# EAGLE board schem (EAGLE 9.4.2)
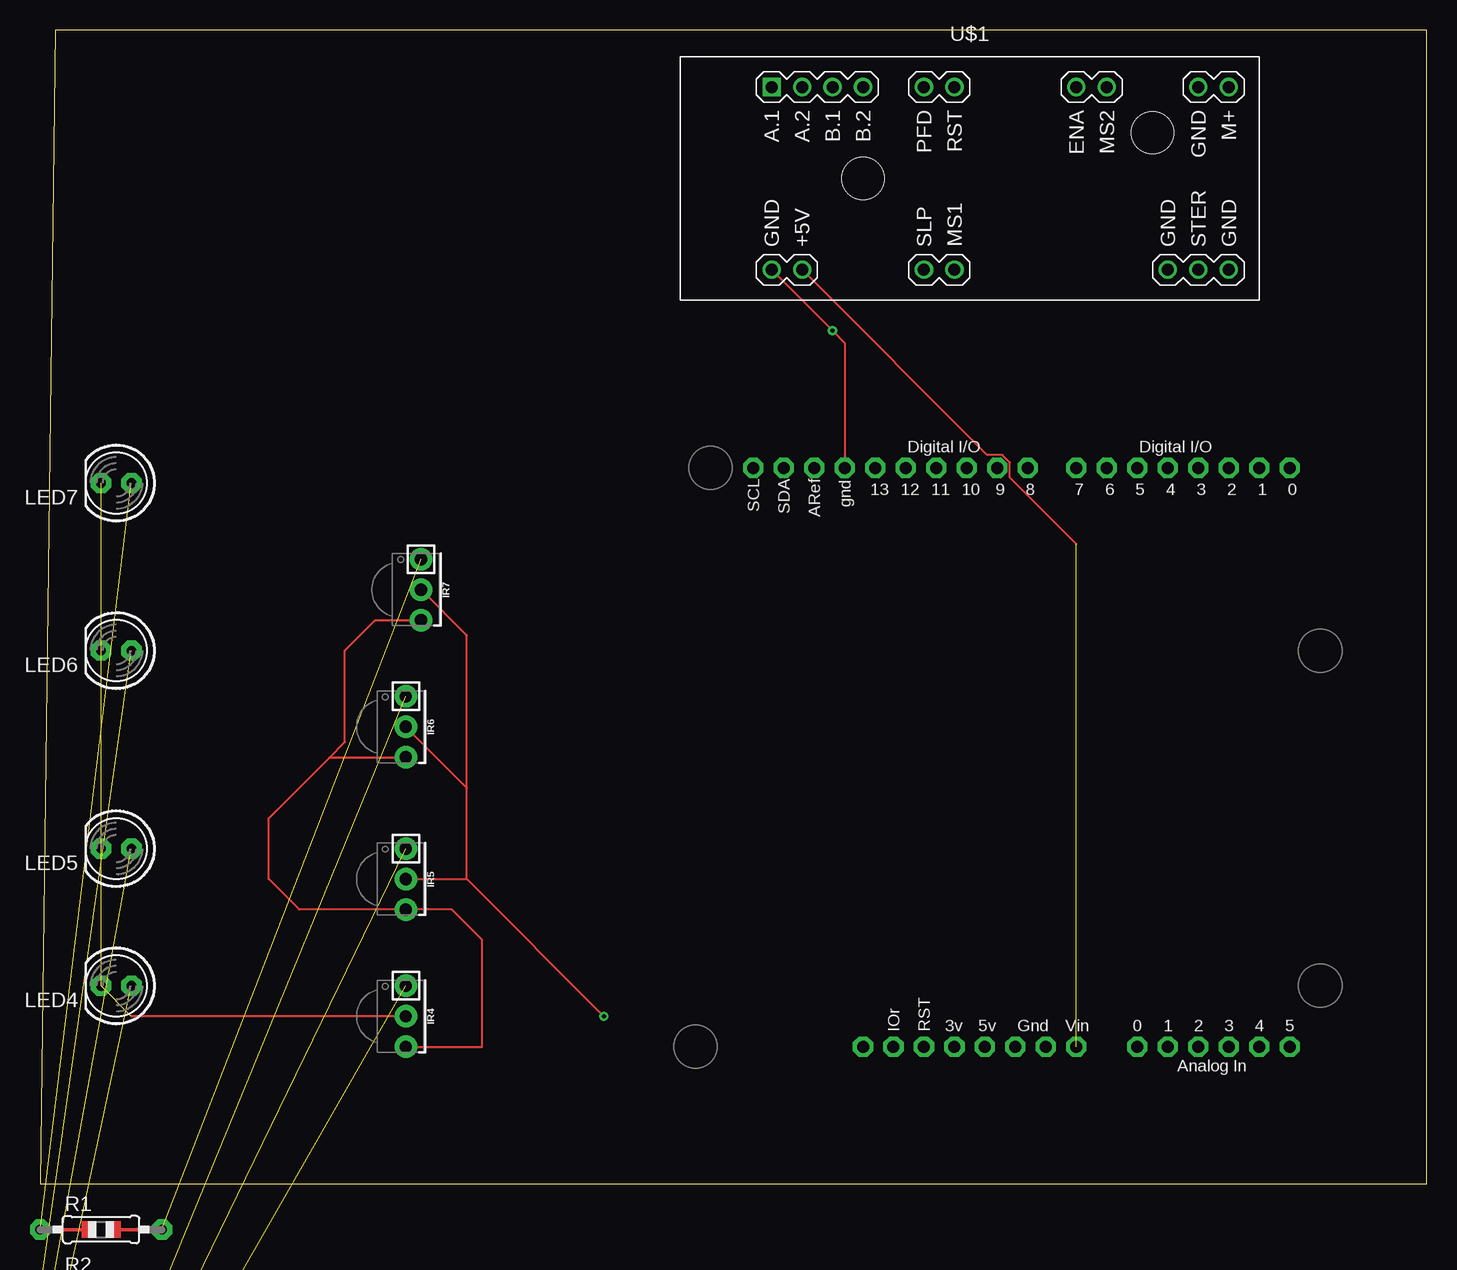
[diagram p0: board, top side]
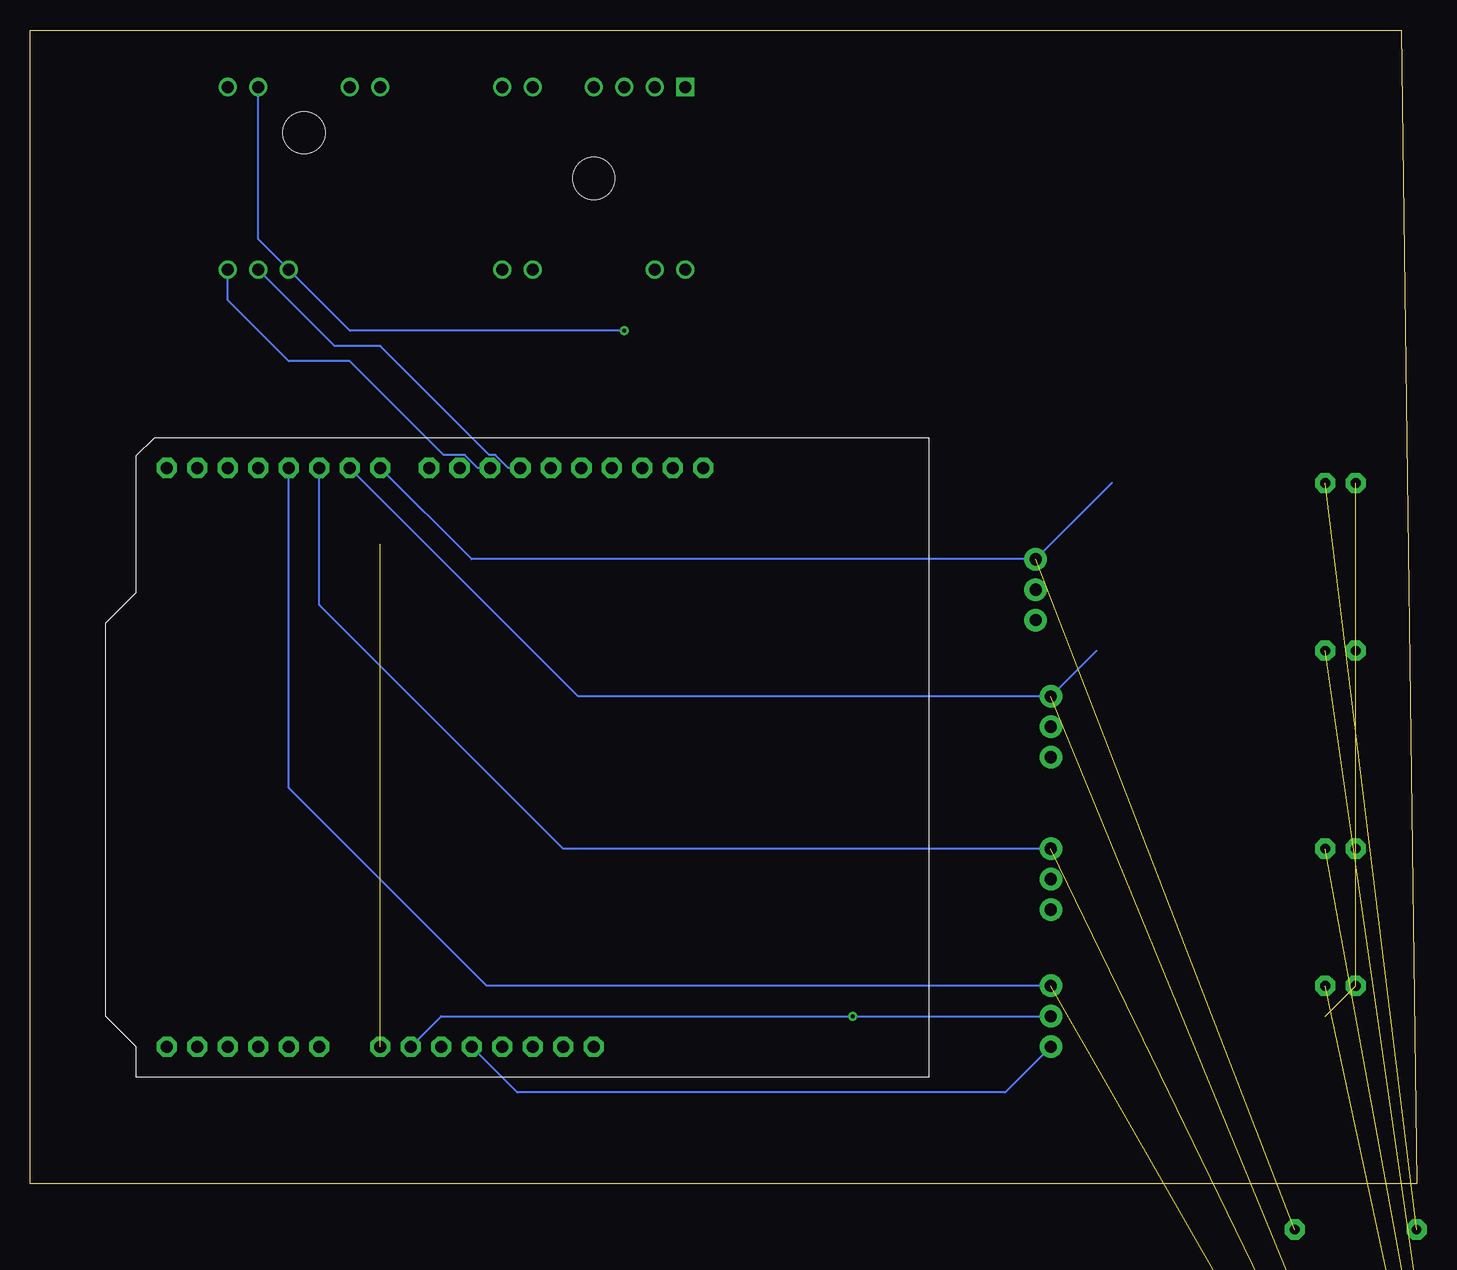
[diagram p1: board, bottom side, seen from below]

Size 115.55 x 96.19 mm. Coordinates in mm from the lower left corner, seen from the top.
Outline: 0,0 115.55,0 115.55,96.19 1.27,96.19 0,0
Copper layers (1*16): Top 0.035mm / dielectric 1.5mm / Bottom 0.035mm
Design rules "default": minimum track width 6mil, minimum drill 0.35mm, track to track 6mil, track to pad 6mil, pad to pad 6mil, via to via 6mil, smd to smd 6mil, copper to edge 40mil, drill to drill 6mil, minimum pad ring 10mil, minimum via ring 8mil, stop-mask expansion 4mil, vias tented up to drill 0mil, thermal gap 10mil

## Footprints (pad centres in the part's own frame; a part is rotated, then mirrored left to right if it is on the bottom)
BRM-2508 = drill 1.016 pad 1.88: 1 -2.54,0; 2 0,0; 3 2.54,0
LED5MM = drill 0.813 pad 1.676 octagon: A -1.27,0; K 1.27,0
0805-THM = drill 0.813 pad 1.676 octagon: 1 -5.08,0; 2 5.08,0
ARDUINOR3-BPLACE = drill 1 pad 1.676 octagon: 3V 35.56,2.54; 5V 38.1,2.54; A0 50.8,2.54; A1 53.34,2.54; A2 55.88,2.54; A3 58.42,2.54; A4 60.96,2.54; A5 63.5,2.54; AREF 23.876,50.8; D0 63.5,50.8; D1 60.96,50.8; D2 58.42,50.8; D3 55.88,50.8; D4 53.34,50.8; D5 50.8,50.8; D6 48.26,50.8; D7 45.72,50.8; D8 41.656,50.8; D9 39.116,50.8; D10 36.576,50.8; D11 34.036,50.8; D12 31.496,50.8; D13 28.956,50.8; GND 26.416,50.8; GND1 43.18,2.54; GND2 40.64,2.54; IOREF 30.48,2.54; RESERVED 27.94,2.54; RESET 33.02,2.54; SCL 18.796,50.8; SDA 21.336,50.8; VIN 45.72,2.54
STEPPER-MOTOR-EASY-DRIVER = drill 1: JP1.1 19.05,7.62; JP1.2 21.59,7.62; JP2.1 16.51,-7.62; JP2.2 19.05,-7.62; JP2.3 21.59,-7.62; JP3.2 -13.97,7.62; JP3.3 -11.43,7.62; JP3.4 -8.89,7.62; JP4.1 -13.97,-7.62; JP4.2 -16.51,-7.62; JP5.1 -1.27,-7.62; JP5.2 -3.81,-7.62; JP6.1 8.89,7.62; JP6.2 11.43,7.62; JP7.1 -3.81,7.62; JP7.2 -1.27,7.62 | drill 1 square: JP3.1 -16.51,7.62 | hole 3.5: -8.89,0; 15.24,3.81

## Placement (x,y rotation side)
IR4  BRM-2508RA  [BRM-2508]  30.48,13.97 270 top
IR5  BRM-2508RA  [BRM-2508]  30.48,25.4 270 top
IR6  BRM-2508RA  [BRM-2508]  30.48,38.1 270 top
IR7  BRM-2508RA  [BRM-2508]  31.75,49.53 270 top
LED4  [LED5MM]  6.35,16.51 180 top
LED5  [LED5MM]  6.35,27.94 180 top
LED6  [LED5MM]  6.35,44.45 180 top
LED7  [LED5MM]  6.35,58.42 180 top
R1  [0805-THM]  5.08,-3.81 0 top  (outside the outline)
R2  [0805-THM]  5.08,-8.89 0 top  (outside the outline)
R3  [0805-THM]  5.08,-13.97 0 top  (outside the outline)
R4  [0805-THM]  5.08,-19.05 0 top  (outside the outline)
U1  ARDUINOR3-BPLACE  [ARDUINOR3-BPLACE]  40.64,8.89 0 top
U$1  STEPPER-MOTOR-EASY-DRIVER  [STEPPER-MOTOR-EASY-DRIVER]  77.47,83.82 0 top

## Library data of the parts
IR4-IR7 = SparkFun-Sensors; PROD_ID: COMP-12059
LED4-LED7 R1-R4 U1 = adafruit
U$1 = diy-modules

## Nets
3V: U1.3V
12V: U$1.JP1.2
GND: U1.GND U$1.JP1.1 U$1.JP2.1 U$1.JP4.2
GND2: U1.GND2
N$1: LED6.A R2.1
N$2: U1.D10 U$1.JP2.3
N$3: U1.D11 U$1.JP2.2
N$4: LED5.A R3.1
N$5: LED4.A R4.1
N$6: LED7.A R1.1
N$11: IR4.3 IR5.3 IR6.3 IR7.3 U1.5V
N$12: IR4.1 R4.2 U1.D4
N$13: IR4.2 IR5.2 IR6.2 IR7.2 LED4.K LED5.K LED6.K LED7.K U1.GND1
N$14: IR5.1 R3.2 U1.D5
N$15: IR6.1 R2.2 U1.D6
N$16: IR7.1 R1.2 U1.D7
V_IN: U1.VIN U$1.JP4.1

## Tracks (layer width: path | path; a pad name or v marks a point on that pad's centre or on a via)
GND  (via drill 0.35)
  Top 0.152: U$1.JP4.2 v66.04,71.12 67.06,70.1 U1.GND
  Bottom 0.152: v66.04,71.12 88.9,71.12 U$1.JP2.1 96.52,78.74 U$1.JP1.1
N$1  (1 unrouted)
N$2
  Bottom 0.152: U1.D10 78.25,59.69 79.31,60.76 81.08,60.76 88.9,68.58 93.98,68.58 99.06,73.66 U$1.JP2.3
N$3
  Bottom 0.152: U1.D11 75.71,59.69 76.77,60.76 77.27,60.76 86.36,69.85 90.17,69.85 U$1.JP2.2
N$4  (1 unrouted)
N$5  (1 unrouted)
N$6  (1 unrouted)
N$11
  Top 0.152: IR4.3 36.83,11.43 36.83,20.32 34.29,22.86 IR5.3 21.59,22.86 19.05,25.4 19.05,30.48 24.13,35.56 | 24.13,35.56 IR6.3 | 24.13,35.56 25.4,36.83 25.4,44.45 27.94,46.99 IR7.3
  Bottom 0.152: IR4.3 34.29,7.62 74.93,7.62 U1.5V
N$12  (1 unrouted)
  Bottom 0.152: IR4.1 77.47,16.51 93.98,33.02 U1.D4
N$13  (via drill 0.35)  (4 unrouted)
  Top 0.152: v46.99,13.97 35.56,25.4 | IR5.2 35.56,25.4 | 35.56,25.4 35.56,33.02 | 35.56,33.02 IR6.2 | 35.56,33.02 35.56,45.72 IR7.2 | IR4.2 7.62,13.97
  Bottom 0.152: U1.GND1 81.28,13.97 v46.99,13.97 IR4.2
N$14  (1 unrouted)
  Bottom 0.152: IR5.1 71.12,27.94 91.44,48.26 U1.D5
N$15  (1 unrouted)
  Bottom 0.152: U1.D6 69.85,40.64 IR6.1 26.67,44.45
N$16  (1 unrouted)
  Bottom 0.152: U1.D7 78.74,52.07 IR7.1 25.4,58.42
V_IN  (1 unrouted)
  Top 0.152: 86.36,53.34 80.82,58.88 80.82,60.13 80.2,60.76 78.94,60.76 U$1.JP4.1